# EAGLE board PCB2D (EAGLE 9.7.0)
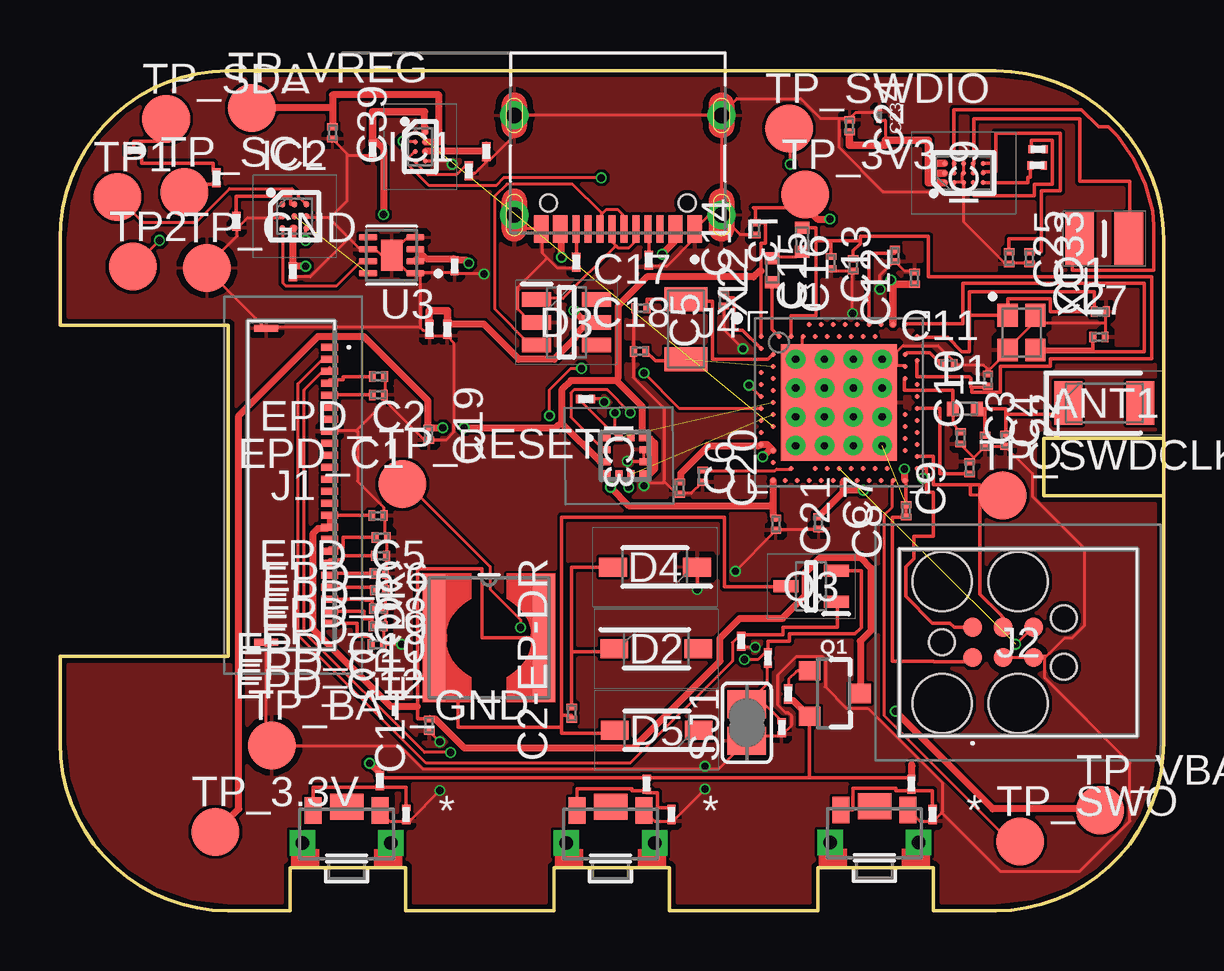
[diagram p0: board, top side]
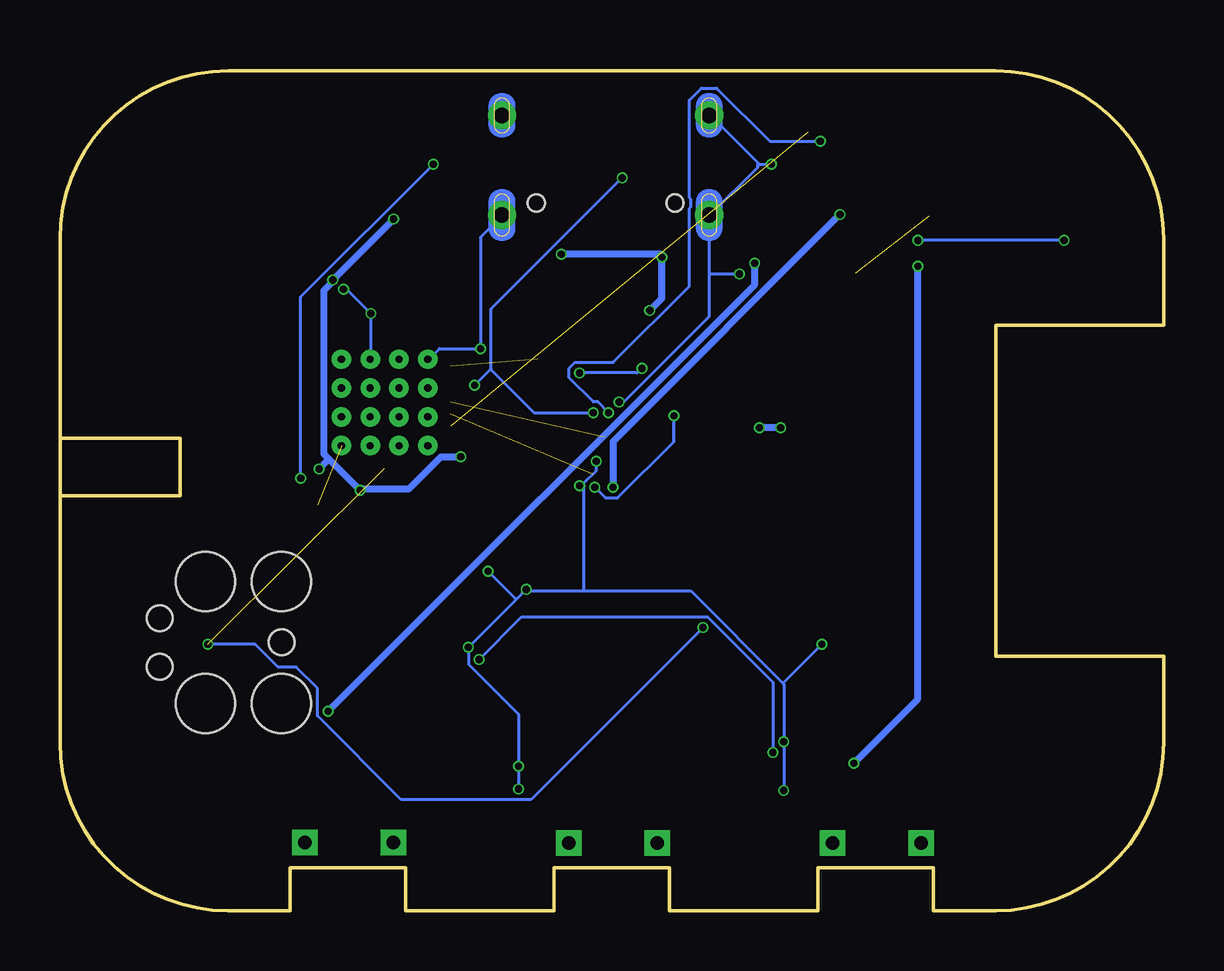
[diagram p1: board, bottom side, seen from below]

Size 46 x 35 mm. Coordinates in mm from the lower left corner, seen from the top.
Outline: 46,17.3 46,7 arc-90 39,0 36.4,0 36.4,1.8 31.6,1.8 31.6,0 25.4,0 25.4,1.8 20.6,1.8 20.6,0 14.4,0 14.4,1.8 9.6,1.8 9.6,0 7,0 arc-90 0,7 0,10.6 7,10.6 7,24.4 0,24.4 0,28 arc-90 7,35 39,35 arc-90 46,28 46,19.7
Outline: 46,17.3 46,17.9
Outline: 46,17.9 46,19.7
Outline: 41,19.7 46,19.7
Outline: 46,19.7 46,17.9
Outline: 41,17.9 41,19.7
Outline: 41,19.7 41,17.3 46,17.3
Outline: 46,17.3 46,17.9
Copper layers (1*16): Top / Bottom
Stack-up Default Layer Stack: Top User Defined 0.035mm / Dielectric-1 User Defined 1.6mm / Bottom User Defined 0.035mm
Design rules: minimum copper width classes=1 0.3mm, minimum copper width 5mil, minimum drill size 0.3mm, copper clearance wire_polygon to wire_polygon 5mil, copper clearance wire_polygon to pad_smd 5mil, copper clearance wire_polygon to via 5mil, copper clearance pad_smd to pad_smd 5mil, copper clearance pad_smd to via 5mil, copper clearance via to via 5mil, copper clearance smd to pad (same net) 5mil, copper clearance smd to via (same net) 5mil, copper clearance smd to smd (same net) 5mil, dimension clearance 0.2mm, via restrict clearance 0mil, restrict clearance 0mil, drill distance 6mil, keepout clearance 0mil
Net classes: 1 traseedeputere: width 0.3 mm

## Footprints (pad centres in the part's own frame; a part is rotated, then mirrored left to right if it is on the bottom)
2450AT18B100E_ANTC3216X140N = smd 1.15 x 1.8: 1 -1.5,0; 2 1.5,0
NORDIC_NRF_3_RESC0201_L = smd 0.28 x 0.43: 1 -0.255,0; 2 0.255,0
GRM011R60J152KE01L_2_CAPC0201X13N = smd 0.22 x 0.23: 1 -0.185,0; 2 0.185,0
GRM011R60J152KE01L_1_0201 = smd 0.35 x 0.25: 1 0,0.275; 2 0,-0.275
ESP32_C6_LIBRARY_5_SOD3716X135N = smd 1.15 x 0.8: 1 -1.75,0; 2 1.75,0
ESP32_C6_LIBRARY_3_SOT95P280X145-6N = smd 1.2 x 0.6: 1 -1.25,0.95; 2 -1.25,0; 3 -1.25,-0.95; 4 1.25,-0.95; 5 1.25,0; 6 1.25,0.95
BQ25180YBGR_BGA8C40P2X4_100X155X50 = smd 0.2 x 0.2: A1 -0.2,0.6; A2 0.2,0.6; B1 -0.2,0.2; B2 0.2,0.2; C1 -0.2,-0.2; C2 0.2,-0.2; D1 -0.2,-0.6; D2 0.2,-0.6
DRV2605YZFR_BGA9C50P3X3_144X144X62 = smd 0.25 x 0.25: A1 -0.5,0.5; A2 0,0.5; A3 0.5,0.5; B1 -0.5,0; B2 0,0; B3 0.5,0; C1 -0.5,-0.5; C2 0,-0.5; C3 0.5,-0.5
BMA423_BMA423 = smd 0.3 x 0.35: 1 -0.75,-0.775; 2 -0.25,-0.775; 3 0.25,-0.775; 4 0.75,-0.775; 7 0.75,0.775; 8 0.25,0.775; 9 -0.25,0.775; 10 -0.75,0.775 | smd 0.35 x 0.3: 5 0.775,-0.25; 6 0.775,0.25; 11 -0.775,0.25; 12 -0.775,-0.25
RT6160AWSC_BGA15C40P3X5_140X230X60 = smd 0.216 x 0.216: A1 -0.4,0.8; A2 0,0.8; A3 0.4,0.8; B1 -0.4,0.4; B2 0,0.4; B3 0.4,0.4; C1 -0.4,0; C2 0,0; C3 0.4,0; D1 -0.4,-0.4; D2 0,-0.4; D3 0.4,-0.4; E1 -0.4,-0.8; E2 0,-0.8; E3 0.4,-0.8
503480-2400_5034802400 = smd 0.3 x 0.7: 1 -5.75,1.525; 2 -5.25,1.525; 3 -4.75,1.525; 4 -4.25,1.525; 5 -3.75,1.525; 6 -3.25,1.525; 7 -2.75,1.525; 8 -2.25,1.525; 9 -1.75,1.525; 10 -1.25,1.525; 11 -0.75,1.525; 12 -0.25,1.525; 13 0.25,1.525; 14 0.75,1.525; 15 1.25,1.525; 16 1.75,1.525; 17 2.25,1.525; 18 2.75,1.525; 19 3.25,1.525; 20 3.75,1.525; 21 4.25,1.525; 22 4.75,1.525; 23 5.25,1.525; 24 5.75,1.525 | smd 0.3 x 1: MP1 -6.54,-1.125; MP2 6.54,-1.125
TC2030-IDC_TC2030IDC = smd 0.783 x 0.783: 1 -0.953,-0.635; 2 -0.953,0.635; 3 0.317,-0.635; 4 0.317,0.635; 5 1.588,-0.635; 6 1.588,0.635 | hole 2.451: -2.223,-2.54; -2.223,2.54; 0.952,-2.54; 0.952,2.54 | hole 1.067: -2.223,0; 2.857,-1.016; 2.857,1.016
KH-TYPE-C-16P_KINGHELM_KH-TYPE-C-16P = smd 0.6 x 1.15: A1_B12 -3.2,4.725; A4_B9 -2.4,4.725; A9_B4 2.4,4.725; A12_B1 3.2,4.725 | smd 0.3 x 1.15: A5 -1.25,4.725; A6 -0.25,4.725; A7 0.25,4.725; A8 1.25,4.725; B5 1.75,4.725; B6 0.75,4.725; B7 -0.75,4.725; B8 -1.75,4.725 | drill 0.65 pad 1.05: SH1 -4.32,0; SH2 4.32,0; SH3 -4.32,4.15; SH4 4.32,4.15 | hole 0.7: -2.89,3.65; 2.89,3.65
NORDIC_NRF_2_RESC0402_L = smd 0.5 x 0.6: 1 -0.5,0; 2 0.5,0
ESP32_C6_LIBRARY_2_IND_4828-WE-TPC_WRE = smd 0.9 x 5.3: 1 -2.286,0; 2 2.286,0
MLP2016SR47MT0S1_INDC2016X100N = smd 1.2 x 2.2: 1 -1.028,0; 2 1.028,0
ESP32_C6_LIBRARY_4_ESP32_C6_LIBRARY_4_ESP32_C6_LIBRARY_4_ESP32_C6_LIBRARY_4_ESP32_WROVER_SPARKFUN-DISCRETESEMI_SOT23-3 = smd 0.8 x 0.9: 1 -0.95,-1; 2 0.95,-1; 3 0,1.1
ESP32_C6_LIBRARY_6_SOT65P210X110-3N = smd 1.05 x 0.5: 1 -1.05,0.65; 2 -1.05,-0.65; 3 1.05,0
CPF0201D7K68C1_0201 = smd 0.35 x 0.25: 1 0,0.275; 2 0,-0.275
ESP32_C6_LIBRARY_7_JUMPER_SJ = smd 1.168 x 1.6: 1 -0.762,0; 2 0.762,0
2025-10-22_07-23-44_LIBRARY_SW_EVP-AKE31A_PAN = smd 0.711 x 1.092: 1 -1.4,-0.972; 2 1.4,-0.972 | drill 0.559 pad 0.914 square: 3 -1.848,0.381; 4 1.848,0.381 | smd 1.397 x 1.092: 5 0,-1.124
HECTOR_WATCH_1_TP20R = smd 2 x 2: TP 0,0
NORDIC_NRF_4_AQFN50P700X700X85_HS-74N = smd 4.85 x 4.85: P$74 0,0 | drill 0.3 pad 0.6: P$75 -1.8,1.8; P$76 -0.6,1.8; P$77 0.6,1.8; P$78 1.8,1.8; P$79 -1.8,0.6; P$80 -0.6,0.6; P$81 0.6,0.6; P$82 1.8,0.6; P$83 -1.8,-0.6; P$84 -0.6,-0.6; P$85 0.6,-0.6; P$86 1.8,-0.6; P$87 -1.8,-1.8; P$88 -0.6,-1.8; P$89 0.6,-1.8; P$90 1.8,-1.8 | smd 0.2 x 0.2: P$A8 -1.25,3.25; P$A10 -0.75,3.25; P$A12 -0.25,3.25; P$A14 0.25,3.25; P$A16 0.75,3.25; P$A18 1.25,3.25; P$A20 1.75,3.25; P$A22 2.25,3.25; P$A23 2.75,3.25; P$AA24 3.25,-2.25; P$AB2 -2.75,-2.5; P$AC5 -2,-2.75; P$AC9 -1,-2.75; P$AC11 -0.5,-2.75; P$AC13 0,-2.75; P$AC15 0.5,-2.75; P$AC17 1,-2.75; P$AC19 1.5,-2.75; P$AC21 2,-2.75; P$AC24 3.25,-2.75; P$AD2 -2.75,-3.25; P$AD4 -2.25,-3.25; P$AD6 -1.75,-3.25; P$AD8 -1.25,-3.25; P$AD10 -0.75,-3.25; P$AD12 -0.25,-3.25; P$AD14 0.25,-3.25; P$AD16 0.75,-3.25; P$AD18 1.25,-3.25; P$AD20 1.75,-3.25; P$AD22 2.25,-3.25; P$AD23 2.75,-3.25; P$B1 -3.25,2.75; P$B3 -2.5,2.75; P$B5 -2,2.75; P$B7 -1.5,2.75; P$B9 -1,2.75; P$B11 -0.5,2.75; P$B13 0,2.75; P$B15 0.5,2.75; P$B17 1,2.75; P$B19 1.5,2.75; P$B24 3.25,2.75; P$C1 -3.25,2.25; P$D2 -2.75,2; P$D23 2.75,2; P$E24 3.25,1.75; P$F2 -2.75,1.5; P$F23 2.75,1.5; P$G1 -3.25,1.25; P$H2 -2.75,1; P$H23 2.75,1; P$J1 -3.25,0.75; P$J24 3.25,0.75; P$K2 -2.75,0.5; P$L1 -3.25,0.25; P$L24 3.25,0.25; P$M2 -2.75,0; P$N1 -3.25,-0.25; P$N24 3.25,-0.25; P$P2 -2.75,-0.5; P$P23 2.75,-0.5; P$R1 -3.25,-0.75; P$R24 3.25,-0.75; P$T2 -2.75,-1; P$T23 2.75,-1; P$U1 -3.25,-1.25; P$U24 3.25,-1.25; P$V23 2.75,-1.5; P$W1 -3.25,-1.75; P$W24 3.25,-1.75; P$Y2 -2.75,-2; P$Y23 2.75,-2
ESP32_C6_LIBRARY_SON50P200X200X80-9N = smd 0.76 x 0.27: 1 -0.985,0.75; 2 -0.985,0.25; 3 -0.985,-0.25; 4 -0.985,-0.75; 5 0.985,-0.75; 6 0.985,-0.25; 7 0.985,0.25; 8 0.985,0.75 | smd 0.9 x 1.3: 9 0,0
NORDIC_NRF_BT-XTAL_2016_N = smd 0.95 x 0.85: 1 -0.725,-0.575; 2 0.725,-0.575; 3 0.725,0.575; 4 -0.725,0.575
NORDIC_NRF_1_XTAL_3215_N = smd 1 x 1.8: 1 -1.25,0; 2 1.25,0

## Placement (x,y rotation side)
ANT1  2450AT18B100E_2450AT18B100E  [2450AT18B100E_ANTC3216X140N]  43.53,21.16 0 top
C1  12pF  [NORDIC_NRF_3_RESC0201_L]  43.36,24.97 0 top
C1-EP-DR  10uF  [NORDIC_NRF_3_RESC0201_L]  15.39,7.74 90 top
C2  12pF  [NORDIC_NRF_3_RESC0201_L]  43.31,23.91 0 top
C2-EP-DR  4.7uF/25V  [NORDIC_NRF_3_RESC0201_L]  21.33,8.24 90 top
C3  1pF  [NORDIC_NRF_3_RESC0201_L]  37.54,19.71 270 top
C4  1pF  [NORDIC_NRF_3_RESC0201_L]  38.56,19.56 270 top
C5  100nF  [NORDIC_NRF_3_RESC0201_L]  27.67,25.46 90 top
C6  4.7uF  [NORDIC_NRF_3_RESC0201_L]  25.84,17.61 270 top
C7  100nF  [NORDIC_NRF_3_RESC0201_L]  31.62,16.16 270 top
C8  100nF  [NORDIC_NRF_3_RESC0201_L]  35.27,16.66 90 top
C9  820pF  [NORDIC_NRF_3_RESC0201_L]  37.92,18.46 90 top
C10  N.C.  [NORDIC_NRF_3_RESC0201_L]  38.68,22.11 90 top
C11  100pF  [NORDIC_NRF_3_RESC0201_L]  37.02,22.76 0 top
C12  100nF  [NORDIC_NRF_3_RESC0201_L]  35.62,26.36 90 top
C13  N.C.  [NORDIC_NRF_3_RESC0201_L]  34.8,27.31 90 top
C14  4.7uF  [NORDIC_NRF_3_RESC0201_L]  28.99,28.41 90 top
C15  1.0uF  [NORDIC_NRF_3_RESC0201_L]  32.14,27.01 90 top
C16  47nF  [NORDIC_NRF_3_RESC0201_L]  33.06,26.91 90 top
C17  12pF  [NORDIC_NRF_3_RESC0201_L]  24.21,25.11 0 top
C18  12pF  [NORDIC_NRF_3_RESC0201_L]  24.16,23.31 0 top
C19  100nF  [NORDIC_NRF_3_RESC0201_L]  15.37,19.86 270 top
C20  4.7uF  [NORDIC_NRF_3_RESC0201_L]  26.79,18.11 270 top
C21  4.7uF  [NORDIC_NRF_3_RESC0201_L]  29.84,16.11 270 top
C22  N.C.  [NORDIC_NRF_3_RESC0201_L]  39.42,19.61 270 top
C23  0.1uF  [GRM011R60J152KE01L_2_CAPC0201X13N]  34.15,33.13 270 top
C24  10uF  [NORDIC_NRF_3_RESC0201_L]  32.91,32.71 270 top
C25  22uF  [NORDIC_NRF_3_RESC0201_L]  39.56,27.21 270 top
C27  0.1uF  [GRM011R60J152KE01L_1_0201]  16.45,26.87 180 top
C29  1uF  [GRM011R60J152KE01L_1_0201]  36.37,4.01 180 top
C30  1uF  [GRM011R60J152KE01L_1_0201]  14.43,4.01 180 top
C31  1uF  [GRM011R60J152KE01L_1_0201]  25.49,4.01 180 top
C32  1uF  [GRM011R60J152KE01L_1_0201]  7.35,28.73 180 top
C33  22uF  [NORDIC_NRF_3_RESC0201_L]  40.41,27.21 270 top
C34  0.1uF  [GRM011R60J152KE01L_1_0201]  9.71,26.63 180 top
C37  1uF  [GRM011R60J152KE01L_1_0201]  17.77,31.63 180 top
C38  1uF  [GRM011R60J152KE01L_1_0201]  13.03,31.73 180 top
C39  10uF  [NORDIC_NRF_3_RESC0201_L]  11.36,32.41 270 top
C42  0.1uF  [GRM011R60J152KE01L_1_0201]  15.39,24.23 180 top
C43  4.7uF  [GRM011R60J152KE01L_1_0201]  16.15,24.23 180 top
D2  MBR0530  [ESP32_C6_LIBRARY_5_SOD3716X135N]  24.86,10.92 0 top
D3  ESP32_C6_LIBRARY_3_USBLC6-2SC6Y  [ESP32_C6_LIBRARY_3_SOT95P280X145-6N]  21.12,24.52 0 top
D4  MBR0530  [ESP32_C6_LIBRARY_5_SOD3716X135N]  24.8,14.32 180 top
D5  MBR0530  [ESP32_C6_LIBRARY_5_SOD3716X135N]  24.88,7.52 180 top
EPD_C1  1uF/50V  [NORDIC_NRF_3_RESC0201_L]  13.27,21.5 180 top
EPD_C2  1uF/50V  [NORDIC_NRF_3_RESC0201_L]  13.28,22.26 180 top
EPD_C5  0.1uF/50V  [NORDIC_NRF_3_RESC0201_L]  13.25,16.46 180 top
EPD_C6  1uF/50V  [NORDIC_NRF_3_RESC0201_L]  13.39,15.56 180 top
EPD_C7  1uF/50V  [NORDIC_NRF_3_RESC0201_L]  13.36,14.8 180 top
EPD_C8  1uF/50V  [NORDIC_NRF_3_RESC0201_L]  13.31,14.06 180 top
EPD_C9  1uF/50V  [NORDIC_NRF_3_RESC0201_L]  13.32,13.36 180 top
EPD_C10  1uF/50V  [NORDIC_NRF_3_RESC0201_L]  13.27,12.6 180 top
EPD_C11  1uF/50V  [NORDIC_NRF_3_RESC0201_L]  13.26,11.86 180 top
EPD_C12  1uF/50V  [NORDIC_NRF_3_RESC0201_L]  13.22,11.1 180 top
IC1  BQ25180YBGR_BQ25180YBGR  [BQ25180YBGR_BGA8C40P2X4_100X155X50]  15.02,31.84 0 top
IC2  DRV2605YZFR_DRV2605YZFR  [DRV2605YZFR_BGA9C50P3X3_144X144X62]  9.78,28.94 0 top
IC3  BMA423_BMA423  [BMA423_BMA423]  23.55,18.96 270.5 top
IC9  RT6160AWSC_RT6160AWSC  [RT6160AWSC_BGA15C40P3X5_140X230X60]  37.67,30.74 90 top
J1  503480-2400_503480-2400  [503480-2400_5034802400]  9.72,17.73 270 top
J2  TC2030-IDC_TC2030-IDC  [TC2030-IDC_TC2030IDC]  38.99,11.18 0 top
J4  KH-TYPE-C-16P_KH-TYPE-C-16P  [KH-TYPE-C-16P_KINGHELM_KH-TYPE-C-16P]  23.26,33.14 180 top
L1  3.9nH  [NORDIC_NRF_2_RESC0402_L]  37.72,20.91 0 top
L2  10uH  [NORDIC_NRF_2_RESC0402_L]  29.69,26.68 90 top
L3  15nH  [NORDIC_NRF_2_RESC0402_L]  30.94,27.96 90.4 top
L5  68uH  [ESP32_C6_LIBRARY_2_IND_4828-WE-TPC_WRE]  17.88,11.37 0 top
L7  MLP2016SR47MT0S1_FTC252012SR47MBCA  [MLP2016SR47MT0S1_INDC2016X100N]  43.53,28.01 0 top
Q1  20V/4.2A/52mΩ/1.4W  [ESP32_C6_LIBRARY_4_ESP32_C6_LIBRARY_4_ESP32_C6_LIBRARY_4_ESP32_C6_LIBRARY_4_ESP32_WROVER_SPARKFUN-DISCRETESEMI_SOT23-3]  32.24,9.06 270 top
Q3  ESP32_C6_LIBRARY_6_SI1308EDL-T1-GE3  [ESP32_C6_LIBRARY_6_SOT65P210X110-3N]  31.31,13.52 180 top
R1_EP_DR  0.47  [CPF0201D7K68C1_0201]  29.51,10.53 180 top
R1_USB  5K1  [CPF0201D7K68C1_0201]  24.54,27.11 180 top
R2  0  [CPF0201D7K68C1_0201]  40.73,31.06 270 top
R2_EP_DR1  10K  [CPF0201D7K68C1_0201]  28.39,11.23 180 top
R2_USB  5K1  [CPF0201D7K68C1_0201]  21.52,27.03 359.3 top
R3  0  [CPF0201D7K68C1_0201]  21.91,21.33 270 top
R4  0  [CPF0201D7K68C1_0201]  40.77,31.73 270 top
R5  10K  [CPF0201D7K68C1_0201]  13.33,5.43 180 top
R7  10K  [CPF0201D7K68C1_0201]  35.49,5.28 180 top
R8  10K  [CPF0201D7K68C1_0201]  24.45,5.28 180 top
R9  10K  [CPF0201D7K68C1_0201]  17.04,30.83 180 top
R17  3K3  [CPF0201D7K68C1_0201]  6.52,30.54 0 top
R18  3K3  [CPF0201D7K68C1_0201]  3.12,31.69 270 top
R_TYPE_SEL  2.2  [CPF0201D7K68C1_0201]  30.09,7.63 180 top
R_TYPE_SEL1  10K  [CPF0201D7K68C1_0201]  30.35,9.03 0 top
SJ1  [ESP32_C6_LIBRARY_7_JUMPER_SJ]  28.63,7.84 90 top
SW1  2025-10-22_07-23-44_LIBRARY_EVP-AKE31ASW_EVP-AKE31A_PAN  [2025-10-22_07-23-44_LIBRARY_SW_EVP-AKE31A_PAN]  11.95,3.21 180 top
SW2  2025-10-22_07-23-44_LIBRARY_EVP-AKE31ASW_EVP-AKE31A_PAN  [2025-10-22_07-23-44_LIBRARY_SW_EVP-AKE31A_PAN]  22.95,3.21 180 top
SW3  2025-10-22_07-23-44_LIBRARY_EVP-AKE31ASW_EVP-AKE31A_PAN  [2025-10-22_07-23-44_LIBRARY_SW_EVP-AKE31A_PAN]  33.95,3.23 180 top
TP1  HECTOR_WATCH_1_TPTP20R  [HECTOR_WATCH_1_TP20R]  2.39,29.74 0 top
TP2  HECTOR_WATCH_1_TPTP20R  [HECTOR_WATCH_1_TP20R]  3.04,26.84 0 top
TP_3.3V  HECTOR_WATCH_1_TPTP20R  [HECTOR_WATCH_1_TP20R]  6.48,3.29 0 top
TP_3V3  HECTOR_WATCH_1_TPTP20R  [HECTOR_WATCH_1_TP20R]  31.07,29.84 0 top
TP_BAT_GND  HECTOR_WATCH_1_TPTP20R  [HECTOR_WATCH_1_TP20R]  8.83,6.89 0 top
TP_GND  HECTOR_WATCH_1_TPTP20R  [HECTOR_WATCH_1_TP20R]  6.13,26.79 0 top
TP_RESET  HECTOR_WATCH_1_TPTP20R  [HECTOR_WATCH_1_TP20R]  14.27,17.78 0 top
TP_SCL  HECTOR_WATCH_1_TPTP20R  [HECTOR_WATCH_1_TP20R]  5.19,29.94 0 top
TP_SDA  HECTOR_WATCH_1_TPTP20R  [HECTOR_WATCH_1_TP20R]  4.43,32.99 0 top
TP_SWDCLK  HECTOR_WATCH_1_TPTP20R  [HECTOR_WATCH_1_TP20R]  39.29,17.31 0 top
TP_SWDIO  HECTOR_WATCH_1_TPTP20R  [HECTOR_WATCH_1_TP20R]  30.39,32.6 0 top
TP_SWO  HECTOR_WATCH_1_TPTP20R  [HECTOR_WATCH_1_TP20R]  40.02,2.89 0 top
TP_VBAT  HECTOR_WATCH_1_TPTP20R  [HECTOR_WATCH_1_TP20R]  43.35,4.19 0 top
TP_VREG  HECTOR_WATCH_1_TPTP20R  [HECTOR_WATCH_1_TP20R]  7.99,33.45 0 top
U1  NORDIC_NRF_4_NRF52840_QF  [NORDIC_NRF_4_AQFN50P700X700X85_HS-74N]  32.47,21.18 0 top
U3  ESP32_C6_LIBRARY_MAX17048G+T10  [ESP32_C6_LIBRARY_SON50P200X200X80-9N]  13.83,27.31 180 top
X1  [NORDIC_NRF_BT-XTAL_2016_N]  40.08,24.09 270 top
X2  32.768kHZ  [NORDIC_NRF_1_XTAL_3215_N]  26.09,24.24 270 top

## Library data of the parts
ANT1 = InkTime_v5; ARROW_PART_NUMBER: 2450AT18B100E; ARROW_PRICE-STOCK: https://www.arrow.com/en/products/2450at18b100e/johanson-dielectrics?utm_currency=USD&region=nac; DESCRIPTION: Antennas 2.45GHz ANTENNA; HEIGHT: 1.4mm; MANUFACTURER_NAME: JOHANSON TECHNOLOGY; MANUFACTURER_PART_NUMBER: 2450AT18B100E; MOUSER_PART_NUMBER: 609-2450AT18B100E; MOUSER_PRICE-STOCK: https://www.mouser.co.uk/ProductDetail/Johanson-Technology/2450AT18B100E?qs=yCnrNFeXz%252Bh5MFsFIXGZGA%3D%3D
C1 C1-EP-DR C2 C2-EP-DR C3-C22 C24 C25 C27 C29-C34 C37-C39 C42 C43 EPD_C1 EPD_C2 EPD_C5-EPD_C12 L1-L3 R1_EP_DR R1_USB R2 R2_EP_DR1 R2_USB R3-R5 R7-R9 R17 R18 R_TYPE_SEL R_TYPE_SEL1 SJ1 TP1 TP2 TP_3.3V TP_3V3 TP_BAT_GND TP_GND TP_RESET TP_SCL TP_SDA TP_SWDCLK TP_SWDIO TP_SWO TP_VBAT TP_VREG U1 X1 X2 = InkTime_v5
C23 = InkTime_v5; AVAILABILITY: In Stock; CHECK_PRICES: https://www.snapeda.com/parts/GRM011R60J152KE01L/Murata/view-part/?ref=eda; DESCRIPTION: SMD Capacitor X5R(EIA) with Capacitance: 1500pF Tol. 10%. Rated Voltage: 6.3Vdc; MF: Murata; MP: GRM011R60J152KE01L; PACKAGE: 0201 Murata; PRICE: None; SNAPEDA_LINK: https://www.snapeda.com/parts/GRM011R60J152KE01L/Murata/view-part/?ref=snap
D2 D4 D5 = InkTime_v5; AVAILABILITY: In Stock; CHECK_PRICES: https://www.snapeda.com/parts/MBR0530/Onsemi/view-part/?ref=eda; DESCRIPTION: Diode Schottky 30 V 500mA Surface Mount SOD-123; MF: ON Semiconductor; MP: MBR0530; PACKAGE: SOD-123-2 ON Semiconductor; PRICE: None; PURCHASE-URL: https://www.snapeda.com/api/url_track_click_mouser/?unipart_id=179458&manufacturer=ON Semiconductor&part_name=MBR0530&search_term=None; SNAPEDA_LINK: https://www.snapeda.com/parts/MBR0530/Onsemi/view-part/?ref=snap
D3 = InkTime_v5; AVAILABILITY: In Stock; CHECK_PRICES: https://www.snapeda.com/parts/USBLC6-2SC6Y/STMicroelectronics/view-part/?ref=eda; DESCRIPTION: 17V Clamp 5A (8/20µs) Ipp Tvs Diode Surface Mount SOT-23-6; MF: STMicroelectronics; MP: USBLC6-2SC6Y; PACKAGE: SOT-23-6 STMicroelectronics; PRICE: None; SNAPEDA_LINK: https://www.snapeda.com/parts/USBLC6-2SC6Y/STMicroelectronics/view-part/?ref=snap
IC1 = InkTime_v5; ARROW_PART_NUMBER: BQ25180YBGR; ARROW_PRICE-STOCK: https://www.arrow.com/en/products/bq25180ybgr/texas-instruments?utm_currency=USD&region=nac; DESCRIPTION: Charger IC Lithium Ion/Polymer, Lithium Iron Phosphate 8-DSBGA (1.6x1.1); HEIGHT: 0.5mm; MANUFACTURER_NAME: Texas Instruments; MANUFACTURER_PART_NUMBER: BQ25180YBGR; MOUSER_PART_NUMBER: 595-BQ25180YBGR; MOUSER_PRICE-STOCK: https://www.mouser.co.uk/ProductDetail/Texas-Instruments/BQ25180YBGR?qs=doiCPypUmgEWjAK%252BJAX6Tw%3D%3D
IC2 = InkTime_v5; ARROW_PART_NUMBER: DRV2605YZFR; ARROW_PRICE-STOCK: https://www.arrow.com/en/products/drv2605yzfr/texas-instruments?region=nac; DESCRIPTION: Haptic Driver for ERM/LRA with Built-In Library and Smart Loop Architecture; HEIGHT: 0.625mm; MANUFACTURER_NAME: Texas Instruments; MANUFACTURER_PART_NUMBER: DRV2605YZFR
IC3 = InkTime_v5; ARROW_PART_NUMBER: BMA423; ARROW_PRICE-STOCK: https://www.arrow.com/en/products/bma423/bosch; DESCRIPTION: Accelerometers Triaxial low-g 12bit Acceleration Sensor; HEIGHT: 1mm; MANUFACTURER_NAME: BOSCH; MANUFACTURER_PART_NUMBER: BMA423; MOUSER_PART_NUMBER: 262-BMA423; MOUSER_PRICE-STOCK: https://www.mouser.co.uk/ProductDetail/Bosch-Sensortec/BMA423?qs=HXFqYaX1Q2xC%252BSgeGoX3mg%3D%3D
IC9 = InkTime_v5; DESCRIPTION: Buck-Boost Regulator Positive Output Step-Up/Step-Down I2C DC-DC Controller IC 15-WL-CSP (BSC) (1.4x2.3); HEIGHT: 0.6mm; MANUFACTURER_NAME: RICHTEK; MANUFACTURER_PART_NUMBER: RT6160AWSC; MOUSER_PART_NUMBER: 835-RT6160AWSC; MOUSER_PRICE-STOCK: https://www.mouser.co.uk/ProductDetail/Richtek/RT6160AWSC?qs=amGC7iS6iy%2FLd9PSoixZXQ%3D%3D
J1 = InkTime_v5; DESCRIPTION: FFC & FPC Connectors 0.5mm FPC RA SMT Dual Contact 24Ckt; HEIGHT: 1.87mm; MANUFACTURER_NAME: Molex; MANUFACTURER_PART_NUMBER: 503480-2400; MOUSER_PART_NUMBER: 538-503480-2400; MOUSER_PRICE-STOCK: https://www.mouser.co.uk/ProductDetail/Molex/503480-2400?qs=OAhjpuo3Vu7efIoxFh9AOw%3D%3D
J2 = InkTime_v5; DESCRIPTION: CABLE ADAPTER 6 POS; HEIGHT: 19mm; MANUFACTURER_NAME: Tag Connect; MANUFACTURER_PART_NUMBER: TC2030-IDC
J4 = InkTime_v5; AVAILABILITY: Not in stock; CHECK_PRICES: https://www.snapeda.com/parts/KH-TYPE-C-16P/Kinghelm/view-part/?ref=eda; MF: kinghelm; MP: KH-TYPE-C-16P; PACKAGE: None; PRICE: None; SNAPEDA_LINK: https://www.snapeda.com/parts/KH-TYPE-C-16P/Kinghelm/view-part/?ref=snap
L5 = InkTime_v5; COPYRIGHT: Copyright (C) 2024 Ultra Librarian. All rights reserved.; MANUFACTURER_PART_NUMBER: 744043680; MFR_NAME: Wurth Electronics
L7 = InkTime_v5; DESCRIPTION: SMD / SMT Inductors (Coils), L=0.47?H, L x W x T :; HEIGHT: 1mm; JLCPCB: https://jlcpcb.com/partdetail/6763488-FTC252012SR47MBCA/C5832368; MANUFACTURER_NAME: TDK; MANUFACTURER_PART_NUMBER: FTC252012SR47MBCA
Q1 = InkTime_v5; PROD_ID: TRAN-14388
Q3 = InkTime_v5; AVAILABILITY: In Stock; CHECK_PRICES: https://www.snapeda.com/parts/SI1308EDL-T1-GE3/Vishay+Siliconix/view-part/?ref=eda; DESCRIPTION: Si1308EDL-T1-GE3 N-channel MOSFET Transistor, 1.5 A, 30 V, 3-Pin SC-70 | Siliconix / Vishay SI1308EDL-T1-GE3; MF: Vishay Siliconix; MP: SI1308EDL-T1-GE3; PACKAGE: SOT-323 Vishay Semiconductor; PRICE: None; PURCHASE-URL: https://www.snapeda.com/api/url_track_click_mouser/?unipart_id=274603&manufacturer=Vishay Siliconix&part_name=SI1308EDL-T1-GE3&search_term=None; SNAPEDA_LINK: https://www.snapeda.com/parts/SI1308EDL-T1-GE3/Vishay+Siliconix/view-part/?ref=snap
SW1-SW3 = InkTime_v5; COPYRIGHT: Copyright (C) 2025 Ultra Librarian. All rights reserved.; DIGI-KEY_PART_NUMBER_1: P123437TR-ND; DIGI-KEY_PART_NUMBER_2: P123437CT-ND; DIGI-KEY_PART_NUMBER_3: P123437DKR-ND; MANUFACTURER_NAME: Panasonic; MANUFACTURER_PART_NUMBER: EVP-AKE31A
U3 = InkTime_v5; AVAILABILITY: In Stock; CHECK_PRICES: https://www.snapeda.com/parts/MAX17048G+T10/Analog+Devices/view-part/?ref=eda; DESCRIPTION: 3µA 1-Cell/2-Cell Fuel Gauge with ModelGauge; MF: Analog Devices; MP: MAX17048G+T10; PACKAGE: TDFN-8 Maxim; PRICE: None; PURCHASE-URL: https://www.snapeda.com/api/url_track_click_mouser/?unipart_id=329239&manufacturer=Analog Devices&part_name=MAX17048G+T10&search_term=None; SNAPEDA_LINK: https://www.snapeda.com/parts/MAX17048G+T10/Analog+Devices/view-part/?ref=snap

## Nets
3V3/1.7D [traseedeputere]: C34.2 IC2.C2 Q1.2 R5.2 R7.2 R8.2 R_TYPE_SEL1.2
3V3/2.4A [traseedeputere]: C6.1 C7.1 C8.1 C12.1 C14.2 C19.1 IC3.3 IC3.7 IC3.10 J2.1 TP_3.3V.TP TP_3V3.TP U1.P$A22 U1.P$AD14 U1.P$AD23 U1.P$B1 U1.P$W1 U1.P$Y2
ALERT/1.6C: U3.5
ALERT/2.5C: U1.P$J24
D+/1.5D: D3.4
D+/2.7D: U1.P$AD6
D-/1.5D: D3.6
D-/2.7D: U1.P$AD4
DEC3: C11.1 U1.P$D23
DEC4_6: C10.1 C15.2 C16.2 L3.2 U1.P$B5 U1.P$E24
DN: D3.1 J4.A7 J4.B7
DP: D3.3 J4.A6 J4.B6
EPD_3V3 [traseedeputere]: C1-EP-DR.2 EPD_C5.2 J1.15 J1.16 L5.2 Q1.3
EPD_BUSY/1.5D: J1.9
EPD_BUSY/2.2D: U1.P$AD12
EPD_CS/1.4C: J1.12
EPD_CS/2.2D: U1.P$K2
EPD_DC/1.5D: J1.11
EPD_DC/2.2D: U1.P$AD10
EPD_RST/1.5D: J1.10
EPD_RST/2.2D: U1.P$AC11
GDR: J1.2 Q3.1 R2_EP_DR1.2
GND: C1-EP-DR.1 C1.2 C2.2 C3.2 C4.2 C5.1 C6.2 C7.2 C8.2 C9.2 C10.2 C11.2 C12.2 C13.1 C14.1 C15.1 C16.1 C17.1 C18.1 C19.2 C20.2 C21.2 C22.2 C23.1 C24.1 C25.2 C27.1 C29.1 C30.1 C31.1 C32.1 C33.2 C34.1 C37.1 C38.1 C39.2 C42.1 C43.1 D3.2 D4.1 EPD_C1.1 EPD_C2.1 EPD_C5.1 EPD_C6.1 EPD_C7.1 EPD_C8.1 EPD_C9.1 EPD_C10.1 EPD_C11.1 EPD_C12.1 IC1.D2 IC2.B1 IC2.B3 IC3.8 IC3.9 IC9.B1 IC9.C1 IC9.C2 IC9.C3 J1.8 J1.MP1 J1.MP2 J2.3 J2.5 J4.A1_B12 J4.A12_B1 J4.SH1 J4.SH2 J4.SH3 J4.SH4 R1_USB.1 R2_EP_DR1.1 R2_USB.2 R3.1 R9.1 R_TYPE_SEL.1 SJ1.1 SW1.1 SW2.1 SW3.1 TP_BAT_GND.TP TP_GND.TP U1.P$74 U1.P$75 U1.P$76 U1.P$77 U1.P$78 U1.P$79 U1.P$80 U1.P$81 U1.P$82 U1.P$83 U1.P$84 U1.P$85 U1.P$86 U1.P$87 U1.P$88 U1.P$89 U1.P$90 U1.P$B7 U1.P$F23 U3.1 U3.4 U3.6 U3.9 X1.2 X1.4
HAPTIC_EN/1.4C: IC2.A1
HAPTIC_EN/2.6A: U1.P$U1
IMU_INT1: IC3.5 U1.P$N1
IMU_INT2: IC3.6 U1.P$P2
LX1: IC9.B2 IC9.B3 L7.1
LX2: IC9.D2 IC9.D3 L7.2
MOSI/1.5B: J1.14
MOSI/2.2D: U1.P$B13
N$1: IC1.D1 R9.2
N$2: C23.2 C24.2 IC9.A1 IC9.A2 IC9.A3
N$3: C25.1 C33.1 IC9.E2 IC9.E3
N$4: R17.1 R18.1
N$5: IC9.D1 R4.2
N$6: IC9.E1 R2.2
N$7: R4.1
N$8: C32.2 IC2.A2
N$9: R2.1
N$10: R17.2 TP_SCL.TP
N$11: R18.2 TP_SDA.TP
N$12: IC3.1 R3.2
N$13: C20.1 U1.P$AC5
N$14: C9.1 U1.P$N24
N$15: C3.1 L1.1 U1.P$H23
N$16: C5.2 U1.P$C1
N$17: C1.1 U1.P$B24 X1.1
N$18: C2.1 U1.P$A23 X1.3
N$19: L2.1 U1.P$B3
N$20: L2.2 L3.1
N$21: C13.2 U1.P$A18
N$22: EPD_C2.2 J1.4
N$23: EPD_C1.2 J1.5
N$24: J1.17
N$26: EPD_C6.2 J1.18
N$27: EPD_C7.2 J1.19
N$28: EPD_C8.2 J1.20
N$29: EPD_C9.2 J1.21
N$30: EPD_C10.2 J1.22
N$31: EPD_C11.2 J1.23
N$32: EPD_C12.2 J1.24
N$33: C2-EP-DR.2 D2.1 D4.2
N$34: R1_EP_DR.1 R_TYPE_SEL.2 SJ1.2
N$35: C2-EP-DR.1 D5.2 L5.1 Q3.3
N$40: J4.B5 R2_USB.1
N$44: J4.A5 R1_USB.2
OUT+: IC2.A3 TP1.TP
OUT-: IC2.C3 TP2.TP
P0.00/XL1: C17.2 U1.P$D2 X2.1
P0.01/XL2: C18.2 U1.P$F2 X2.2
P0.04: U1.P$J1
P0.09: U1.P$L24
P0.13/1.5D: C30.2 R5.1 SW1.2
P0.13/2.6C: U1.P$AD8
P0.14/1.5D: C31.2 R8.1 SW2.2
P0.14/2.7C: U1.P$AC9
P0.19: U1.P$AC15
P0.20: U1.P$AD16
P0.21: U1.P$AC17
P0.22: U1.P$AD18
P0.23: U1.P$AC19
P0.24: U1.P$AD20
P0.25: U1.P$AC21
P0.26: U1.P$G1
P0.27: U1.P$H2
P0.28: U1.P$B11
P0.29: U1.P$A10
P0.30: U1.P$B9
P0.31: U1.P$A8
P1.01/1.6C: Q1.1 R_TYPE_SEL1.1
P1.01/2.4B: U1.P$Y23
P1.02/1.6C: C29.2 R7.1 SW3.2
P1.02/2.8C: U1.P$W24
P1.03: U1.P$V23
P1.04: U1.P$U24
P1.05: U1.P$T23
P1.06: U1.P$R24
P1.07: U1.P$P23
P1.09: U1.P$R1
P1.10: U1.P$A20
P1.11: U1.P$B19
P1.12: U1.P$B17
P1.13: U1.P$A16
P1.14: U1.P$B15
P1.15: U1.P$A14
PMIC_INT: IC1.A1 U1.P$T2
PREVGH: D5.1
PREVGL: D2.2
RESE: J1.3 Q3.2 R1_EP_DR.2
RESET: J2.6 TP_RESET.TP U1.P$AC13
RF: ANT1.1 C4.1 C22.1 L1.2
SCK/1.5B: J1.13
SCK/2.2D: U1.P$A12
SCL/1.4C: IC2.C1 U3.7
SCL/2.4C: IC1.B1 IC3.12 U1.P$M2
SDA/1.4C: IC2.B2 U3.8
SDA/2.4C: IC1.C1 IC3.2 U1.P$L1
SWDCLK: J2.4 TP_SWDCLK.TP U1.P$AA24
SWDIO: J2.2 TP_SWDIO.TP U1.P$AC24
SWO: TP_SWO.TP U1.P$AD22
VBAT/1.2A [traseedeputere]: C27.2 TP_VBAT.TP U3.2 U3.3
VBAT/2.5C [traseedeputere]: C37.2 IC1.C2
VBUS/1.5D [traseedeputere]: C42.2 C43.2 D3.5 J4.A4_B9 J4.A9_B4
VBUS/2.6D [traseedeputere]: C21.1 C38.2 IC1.A2 U1.P$AD2
VREG [traseedeputere]: C39.1 IC1.B2 TP_VREG.TP

## Tracks (layer width: path | path; a pad name or v marks a point on that pad's centre or on a via)
3V3/1.7D  (via drill 0.3)
  Top 0.152: R7.2 31.3,5.55 | 31.3,5.55 R8.2 13.33,5.55 R5.2 | 35.49,6.1 35.5,6.1 | Q1.2 31.24,5.55 31.3,5.55
  Top 0.3: IC2.C2 9.71,28.44 C34.2 9.8,26.85 v10.24,26.85 | 35.5,6.1 35.52,6.03 35.52,5.58 R7.2 | R_TYPE_SEL1.2 30.37,8.76 30.56,8.76 31.2,8.12 Q1.2 | v12.91,6.15 13.29,5.77 R5.2
  Bottom 0.3: v10.24,26.85 10.24,8.82 v12.91,6.15
3V3/2.4A  (via drill 0.3)
  Top 0.152: TP_3V3.TP 31.07,29.3 28.9,29.3 28.99,29.21 C14.2 29.41,28.66 29.41,27.81 29.22,27.81 29.22,26.66 U1.P$B1 | U1.P$AD23 35.27,17.88 C8.1 34.7,16.41 34.7,10.4 36.4,10.4 36.43,10.37 38.01,10.37 38.04,10.4 J2.1
  Top 0.3: 20.91,20.31 22.5,18.73 22.75,18.73 IC3.3 | 20.91,20.31 20.91,21.71 21.29,22.09 23.2,22.09 | 23.2,22.09 24.28,21.01 24.28,19.74 IC3.10 24.47,19.68 24.6,19.68 24.79,19.49 24.79,18.41 24.6,18.22 IC3.7 | U1.P$W1 29.48,19.42 29.64,19.27 | 29.64,19.27 29.68,19.23 U1.P$Y2 | U1.P$W1 | C6.1 25.87,17.9 25.87,18.22 27.01,19.36 29.1,19.36 U1.P$W1 | 32.66,17.52 32.66,17.46 31.64,16.44 C7.1 | 32.66,17.52 32.66,17.9 U1.P$AD14 | v34.63,26.28 34.63,26.22 34.72,26.1 | v32.09,28.82 31.58,28.82 31.14,29.27 TP_3V3.TP | v33.49,17.52 32.79,17.52 32.66,17.52 | v29.3,18.92 29.55,19.17 29.64,19.27 | 23.2,22.09 23.26,22.22 23.26,25.2 24.47,26.41 28.91,26.41 29.17,26.66 29.22,26.66 | v35.2,18.41 35.2,17.96 U1.P$AD23 | TP_3.3V.TP 6.5,3.29 7.45,4.25 7.45,20.63 10.75,23.93 12.66,23.93 15.33,21.27 15.33,20.12 C19.1 15.52,20.12 v15.96,20.12 | v16.85,20.12 20.66,20.12 20.79,20.25 20.91,20.31
  Top 0.302: U1.P$A22 34.72,26.1 C12.1
  Bottom 0.3: v32.09,28.82 v34.63,26.28 34.69,26.16 35.01,25.84 35.01,19.04 34.79,18.82 | 34.79,18.82 v33.49,17.52 33.36,17.58 31.45,17.58 30.12,18.92 v29.3,18.92 | v35.2,18.41 34.88,18.73 34.79,18.82 | v15.96,20.12 v16.85,20.12
DEC3
  Top 0.152: U1.P$D23 35.3,23.26 36.26,23.26 C11.1
DEC4_6
  Top 0.152: 31.5,27.91 32.14,27.91 | 32.14,27.91 32.54,27.91 33.36,27.91 33.36,27.8 | 32.14,27.91 C15.2 | 33.36,27.8 33.06,27.5 C16.2 | U1.P$B5 30.47,24.8 31.5,24.8 31.5,27.91 | U1.P$E24 35.72,22.25 37.9,22.25 37.96,22.19 37.96,21.82 | 33.36,27.8 33.36,28.1 36.2,28.1 36.2,26.42 45.5,26.42 45.5,23 41.28,23 41.28,22.69 39.2,22.69 39.2,22.6 39.2,21.6 38,21.6 38,21.82 37.96,21.82 | 37.96,21.82 38.19,21.82 38.68,21.82 C10.1 | 31.5,27.91 31.5,28.46 L3.2
DN
  Top 0.127: 23.17,27.71 23.26,27.62 23.71,27.62 23.96,27.87 23.96,28.38 J4.B7 | 23.17,27.71 23.01,27.87 23.01,28.38 J4.A7 | D3.1 19.9,25.52 20.98,25.52 23.13,27.68 23.17,27.71
DP
  Top 0.127: 22.59,29.04 22.75,29.2 23.26,29.2 23.45,29.01 23.45,28.44 J4.A6 | 22.59,29.04 22.56,29.01 22.56,28.44 J4.B6 | D3.3 19.83,23.62 19.58,23.62 18.12,25.08 18.12,29.78 18.63,30.28 21.36,30.28 22.56,29.08 22.59,29.04
EPD_3V3
  Top 0.152: J1.15 13,16.48 EPD_C5.2 | C1-EP-DR.2 14.9,7.99 14.9,8.5 14.9,14.1 14.9,14.25 17.6,14.25 17.6,14.1 17.6,11.37 L5.2 18,11.37
  Top 0.3: J1.15 11.26,16.44 11.26,15.99 J1.16 11.13,15.93 10.75,15.93 10.56,15.74 10.56,11.74 13.8,8.5 14.88,8.5 14.9,8.5 | Q1.3 33.36,9.07 33.36,11.23 33.8,11.68 33.8,14.28 33.36,14.73 31.71,14.73 31.07,14.09 31.07,13.14 30.12,12.18 28.34,12.18 27.52,11.36 27.52,10.41 23.9,6.79 16.85,6.79 15.64,7.99 15.45,7.99 C1-EP-DR.2
GDR
  Top 0.127: J1.2 11.2,22.98 10.94,22.98 9.93,21.96 9.93,11.49 15.26,6.15 23.77,6.15 28.02,10.41 28.02,11.17 28.34,11.49 R2_EP_DR1.2
  Top 0.152: Q3.1 32.4,12.87 32.4,12 32.4,11.81 30.13,11.81 30.13,11.5 R2_EP_DR1.2
GND  (via drill 0.3)  (1 unrouted)
  Top 0.127: C20.2 26.75,17.84 26.31,17.39 25.87,17.39 C6.2 25.8,17.39 25.67,17.39 25.2,17.87 | C17.1 23.9,25.08 23.9,23.36 C18.1 23.9,23.3 23.9,22.22 25.17,20.95 25.17,17.9 25.2,17.87 | SW2.1 24.41,4.12 24.79,3.74 C31.1 25.55,3.74 v26.88,5.07 | SW1.1 13.36,4.12 13.74,3.74 14.37,3.74 C30.1 14.56,3.74 v15.83,5.01 | C7.2 31.58,15.87 29.87,15.87 C21.2 29.8,15.8 v28.15,14.15 | IC3.9 24.34,19.17 IC3.8 24.28,18.73 v23.64,18.73 | v28.98,10.98 28.41,10.98 R2_EP_DR1.1 | v26.56,13.39 26.56,14.28 D4.1 | v15.83,7.04 15.45,7.42 C1-EP-DR.1 | v24.34,17.71 24.47,17.84 25.17,17.84 25.2,17.87 | J2.3 39.33,10.53 40.53,10.53 J2.5 40.6,10.6 41.04,10.6 | 38.09,18.88 38.5,19.3 C4.2 38.57,19.36 39.39,19.36 C22.2 39.45,19.3 40.53,18.22 40.53,17.27 42.69,15.11 42.69,11.87 42.19,11.36 41.87,11.36 41.11,10.6 41.04,10.6 | 38.09,18.88 37.93,18.73 C9.2 | C3.2 37.55,19.42 38.06,18.92 38.09,18.88 | J1.MP2 8.59,11.17 8.59,7.1 8.78,6.91 TP_BAT_GND.TP 8.85,6.85 14.18,6.85 15.13,5.9 26.88,5.9 | SW3.1 35.39,4.18 35.83,3.74 36.34,3.74 C29.1 36.41,3.74 36.76,4.09 | 36.76,4.09 36.79,4.12 36.79,5.33 33.68,8.44 32.79,8.44 31.9,9.33 31.9,10.47 31.77,10.6 30.69,10.6 29.93,9.84 29.93,8.57 30.25,8.25 30.37,8.25 30.5,8.12 30.5,7.74 30.12,7.36 R_TYPE_SEL.1 30.06,7.3 28.85,7.3 28.66,7.1 SJ1.1 28.6,7.04 27.45,5.9 26.88,5.9 | 41.04,10.6 41.04,9.71 44.6,6.15 44.6,3.74 42.5,1.64 39.2,1.64 36.79,4.06 36.76,4.09 | 26.88,5.9 v26.88,6.03 | EPD_C2.1 13.55,22.22 13.55,21.52 EPD_C1.1 13.55,21.46 13.55,21.27 13.58,21.23 | 13.58,21.23 15.2,19.61 15.33,19.61 C19.2 15.39,19.61 16.09,19.61 16.4,19.93 16.4,23.68 16.15,23.93
  Top 0.127: 12.37,20.03 13.55,21.2 13.58,21.23 | 12.37,20.03 12.34,20 11.26,20 J1.8 | 12.37,20.03 12.4,20 12.4,17.9 13.48,16.82 13.48,16.5 EPD_C5.1 13.55,16.44 13.55,15.68 13.61,15.61 EPD_C6.1 13.61,15.55 13.61,14.85 EPD_C7.1 13.61,14.79 13.61,14.09 EPD_C8.1 13.61,14.03 13.61,13.39 EPD_C9.1 13.55,13.33 13.55,12.63 EPD_C10.1 13.55,12.57 13.55,11.87 EPD_C11.1 13.48,11.8 13.48,11.11 EPD_C12.1 13.55,11.11 v14.24,11.11 | IC2.B1 9.23,28.89 7.83,28.89 7.39,28.44 C32.1 7.39,28.38 7.39,28.12 6.12,26.85 TP_GND.TP 6.12,26.73 8.53,24.31 J1.MP1 8.59,24.31 15.01,24.31 | 16.15,23.93 15.45,23.93 C42.1 15.39,24 15.2,24.19 15.13,24.19 15.01,24.31 | 16.15,23.93 C43.1 16.15,23.93 | 15.01,26.6 14.82,26.6 U3.1 | 15.01,26.6 16.4,26.6 C27.1 16.47,26.54 v17.67,26.54 | 15.01,26.6 15.01,24.31 | 15.01,26.6 U3.1 | U3.4 14.75,28 14.44,28 13.8,27.36 U3.9 | 11.99,31.52 11.39,32.12 C39.2 | 11.99,31.52 12.02,31.49 12.97,31.49 C38.1 | 12.05,28.03 12.47,27.62 12.78,27.62 U3.6 13.16,27.55 13.36,27.36 13.74,27.36 U3.9 | 12.05,28.03 11.23,28.85 | 11.23,28.85 11.2,28.89 10.31,28.89 IC2.B3 | C34.1 9.74,26.41 10.44,26.41 12.02,28 12.05,28.03 | 11.99,31.52 11.96,31.49 11.96,29.58 11.26,28.89 11.23,28.85 | U3.1 14.75,26.6 14.5,26.6 13.8,27.3 U3.9 | 38.66,22.57 38.63,22.54 38.63,22.41 C10.2 | 38.66,22.57 38.63,22.6 38.5,22.73 37.3,22.73 C11.2 37.23,22.79 37.23,22.92 36.6,23.55 35.14,23.55 34.88,23.3 34.88,22.73 | 38.66,22.57 38.71,22.52 39.5,23.31 X1.2 39.52,23.42 40.72,24.63 X1.4 40.66,24.76 40.91,24.5 43.58,24.5 | 43.58,24.5 43.58,24.95 C1.2 | 43.58,24.5 43.58,23.93 C2.2 | C12.2 35.58,26.66 35.2,26.66 34.82,27.04 C13.1 34.76,27.04 34.18,26.47 v34.18,25.9
  Top 0.127: C15.1 32.15,26.73 32.22,26.66 33.04,26.66 C16.1 33.04,26.6 v33.04,24.88 | v28.47,23.42 27.71,24.19 27.71,25.2 C5.1 | 34.88,22.73 34.5,22.73 34.31,22.92 U1.P$74 | 34.88,22.73 35.2,22.73 U1.P$F23 | 30.69,22.98 30.94,23.23 30.94,23.87 U1.P$B7 | 30.69,22.98 U1.P$74 | U1.P$74 30.69,20.57 30.69,19.42 U1.P$87 30.75,19.42 31.83,19.42 U1.P$88 | U1.P$83 30.69,20.63 U1.P$74 | U1.P$84 31.9,20.63 31.9,20.95 U1.P$74 | U1.P$74 33.11,20.57 33.11,19.42 U1.P$89 33.17,19.42 34.25,19.42 U1.P$90 | U1.P$74 33.11,20.63 U1.P$85 33.17,20.63 34.25,20.63 U1.P$86 | U1.P$79 30.69,21.84 31.26,22.41 U1.P$74 | U1.P$80 31.9,21.84 U1.P$74 | U1.P$81 33.11,21.84 U1.P$74 | U1.P$82 34.25,21.84 33.74,22.35 U1.P$74 | U1.P$76 31.83,22.92 31.33,22.41 U1.P$74 | U1.P$78 34.31,22.98 U1.P$74 | 30.69,22.98 U1.P$75 | 30.69,22.98 U1.P$74 | U1.P$77 33.11,22.92 33.68,22.35 U1.P$74 | 34.88,22.73 U1.P$74 | 20.31,27.2 20.09,27.43 20.09,28.38 J4.A12_B1 20.02,28.44 19.45,28.44 18.94,28.95 J4.SH4 | 20.31,27.2 20.72,26.79 21.48,26.79 R2_USB.2 | D3.2 19.83,24.57 19.58,24.57 19.07,25.08 19.07,25.96 20.28,27.17 20.31,27.2 | R9.1 17.1,30.6 17.23,30.73 17.29,30.73 17.74,31.17 17.74,31.3 C37.1 17.8,31.3 17.93,31.3 18.88,32.25 18.88,33.14 J4.SH2 27.52,33.14 J4.SH1 | v16.34,31.11 16.21,31.24 15.26,31.24 IC1.D2 | v22.69,21.2 22.56,21.33 22.25,21.33 R3.1 | IC9.C1 37.61,30.35 37.3,30.35 IC9.B1 37.23,30.28 37.23,30.16 37.04,29.97 34.31,29.97 32.47,31.81 32.47,33.01 | IC9.C1 37.61,30.41 37.61,30.73 IC9.C2 37.68,30.79 37.68,31.11 IC9.C3 | C33.2 40.41,26.98 39.58,26.98 C25.2 39.52,26.98 39.39,26.98 37.68,28.69 37.68,30.28 IC9.C1 | C14.1 28.98,28.19 28.34,28.19 27.58,28.95 J4.SH3
  Top 0.127: R1_USB.1 24.6,26.85 25.29,26.85 26.44,28 26.44,28.38 J4.A1_B12 26.5,28.44 27.01,28.95 27.52,28.95 J4.SH3 | C23.1 34.12,33.27 33.17,33.27 32.91,33.01 C24.1 32.85,33.01 32.47,33.01 | 32.47,33.01 31.71,33.01 30.88,33.84 28.22,33.84 27.58,33.2 J4.SH1 | J4.SH3 27.58,29.01 J4.SH1
  Bottom 0.127: 26.98,12.98 v26.56,13.39 26.56,13.33 24.15,13.33 | 26.98,12.98 v28.98,10.98 28.98,10.28 26.88,8.18 v26.88,6.03 v26.88,5.07 | 15.86,9.49 19.71,13.33 24.15,13.33 | 15.86,9.49 15.83,9.45 v15.83,7.04 v15.83,5.01 | v23.64,18.73 23.64,18.34 24.15,17.84 24.15,17.71 | 24.15,13.33 24.15,17.71 | v28.15,14.15 27.01,13.01 26.98,12.98 | 24.15,17.71 v24.34,17.71 | U1.P$77 33.04,22.98 v33.04,24.88 34.06,25.9 v34.18,25.9 | U1.P$75 30.63,22.98 30.18,23.42 v28.47,23.42 28.47,28.06 27.58,28.95 J4.SH3 | v16.34,31.11 16.85,31.11 16.88,31.14 | 16.88,31.14 18.88,33.14 J4.SH2 | v22.69,21.2 22.5,21.2 18.94,24.76 18.94,26.54 | 18.94,26.54 18.94,28.95 J4.SH4 18.88,29.01 16.91,30.98 16.91,31.11 16.88,31.14 | 18.94,26.54 v17.67,26.54 | v14.24,11.11 15.83,9.52 15.86,9.49
  pour Top: -2.9,37.6 48,37.6 48,-2.9 -2.7,-2.9 -2.7,37 -3.3,37 -3.3,37.6 -2.8,37.6
IMU_INT1  (via drill 0.3)
  Top 0.127: v24.34,22.41 25.8,20.95 29.17,20.95 U1.P$N1 | v21.74,22.6 21.29,22.6 20.41,21.71 v20.41,20.63 | v23.71,17.65 23.33,18.03 23.33,18.16 IC3.5
  Bottom 0.127: v24.34,22.41 21.93,22.41 v21.74,22.6 | v20.41,20.63 20.41,19.55 22.75,17.2 23.26,17.2 v23.71,17.65
IMU_INT2  (1 unrouted)
LX1
  Top 0.127: L7.1 42.44,28 42.44,27.62 42.25,27.43 42.2,27.4
  Top 0.152: IC9.B2 IC9.B3 37.27,33.38 42.58,33.38 43.3,32.66 43.71,32.66 44.09,32.27 44.76,31.32 45.25,30.27 45.55,29.15 45.6,28.54 45.6,26.8 45.6,26.7 42.2,26.7 42.2,27.4
LX2
  Top 0.152: IC9.D2 IC9.D3 38.1,31.14 38.1,33 42.4,33 42.5,33 42.5,30.7 42.5,30.4 44.6,30.4 44.6,28.01 L7.2
N$1
  Top 0.127: IC1.D1 14.88,31.24 14.88,31.11 15.33,30.66 16.53,30.66 16.91,31.04 17.04,31.04 R9.2
N$2
  Top 0.127: C23.2 34.4,32.94 34.4,32.1
  Top 0.302: 34.4,32.1 34.4,31.9 32.91,31.9 C24.2 | 34.4,32.1 34.5,32.1 35.1,32.1 36.2,32.1 36.2,32 36.2,31.14 | 34.45,32.1 34.4,32.1 | IC9.A1 36.2,30.34 36.2,30.4 36.2,30.74 | 36.2,30.74 IC9.A2 | IC9.A3 36.2,31.14 | 36.2,31.14 36.2,30.74
N$3
  Top 0.152: IC9.E2 38.47,30.8 39,30.8 39,31.14 | 39,31.14 IC9.E3 | 39,31.14 39,32.4 39.5,32.4 41.7,32.4 41.7,30 40.9,30 40.9,29.7 40.9,28 | 40.9,28 40.9,27.46 C33.1 | 40.9,28 39.6,28 39.56,28 C25.1
N$4
  Top 0.152: R18.1 3.4,31.14 6.39,31.14 6.39,30.81 R17.1
N$5
  Top 0.152: IC9.D1 38.1,30.34 38.1,29.8 40.62,29.8 40.62,30.28 41.37,30.28 41.37,32.11 40.49,32.11 R4.2
N$6
  Top 0.152: IC9.E1 40.34,30.34 40.34,30.56 40.45,30.56 R2.2
N$8
  Top 0.152: IC2.A2 9.61,29.44 9.61,29.77 7.35,29.77 C32.2
N$10
  Top 0.152: TP_SCL.TP 5.19,30.26 R17.2
N$11
  Top 0.152: R18.2 3.07,31.69 3.07,32.07 4.43,32.07 TP_SDA.TP
N$12
  Top 0.127: IC3.1 22.75,19.74 22.75,20.19 21.61,21.33 R3.2
N$13
  Top 0.127: U1.P$AC5 30.44,18.41 29.87,18.41 29.8,18.34 26.82,18.34 C20.1
N$14
  Top 0.152: U1.P$N24 36.68,20.93 36.68,18.2 C9.1
N$15
  Top 0.127: L1.1 37.22,20.28 C3.1
  Top 0.152: L1.1 37.22,21.68 35.2,21.68 35.2,22.18 U1.P$H23
N$16
  Top 0.152: U1.P$C1 28.45,24.2 28.09,24.2 28.09,25.55 27.67,25.55 C5.2
N$17
  Top 0.152: U1.P$B24 35.72,23.9 37,23.9 37.6,23.3 37.9,23.3 37.9,23.6 37.9,23.68 37.91,23.68 37.91,24.81 | 37.91,24.81 X1.1 39.5,25.49 41.28,25.49 41.28,24.97 C1.1 43.11,25.8 43.1,25.8 38.1,25.8 37.91,25.8 37.91,24.81
N$18
  Top 0.127: U1.P$A23 35.2,24.44 35.22,24.46
  Top 0.152: C2.1 43.05,23.4 42.3,23.4 40.66,23.4 X1.3 40.66,23.3 45.2,23.3 45.2,26.14 37.64,26.14 37.64,24.46 35.22,24.46
N$19
  Top 0.152: U1.P$B3 29.67,24.23 29.67,26.16 L2.1
N$20
  Top 0.127: L2.2 29.74,27.23 30.69,27.23 30.88,27.43 L3.1
N$21
  Top 0.127: C13.2 34.82,27.55 34.82,27.43 34.8,27.4
  Top 0.152: 34.8,27.4 34,27.4 33.72,27.4 U1.P$A18
N$22
  Top 0.152: J1.4 11.24,22.13 11.8,22.13 11.8,22.26 EPD_C2.2
N$23
  Top 0.152: J1.5 11.24,21.5 EPD_C1.2
N$26
  Top 0.152: J1.18 11.24,15.13 11.8,15.13 11.8,15.56 EPD_C6.2
N$27
  Top 0.152: J1.19 11.24,14.63 11.8,14.63 11.8,14.8 EPD_C7.2
N$28
  Top 0.152: J1.20 11.24,14.06 EPD_C8.2
N$29
  Top 0.152: J1.21 13.06,13.48 EPD_C9.2
N$30
  Top 0.152: J1.22 12.72,12.98 12.72,12.94 13.02,12.94 EPD_C10.2
N$31
  Top 0.152: J1.23 12.67,12.48 12.67,12.18 13,12.18 EPD_C11.2
N$32
  Top 0.152: J1.24 12.39,11.98 12.39,11.44 12.97,11.44 EPD_C12.2
N$33
  Top 0.152: 21.33,10.8 C2-EP-DR.2 | 21.33,10.8 21.5,10.8 23.11,10.8 D2.1 | 21.33,10.8 21.33,14.32 D4.2
N$34
  Top 0.127: R1_EP_DR.1 29.48,10.22 29.48,9.45 28.66,8.63 SJ1.2 29.04,8.95 30.06,7.93 R_TYPE_SEL.2
N$35
  Top 0.127: L5.1 15.64,11.36 15.64,9.71 16.53,8.82 16.6,8.8
  Top 0.152: Q3.3 30.26,13.5 27.7,13.5 27.7,16.4 22,16.4 20.91,16.4 20.91,8.15 | 20.91,8.15 21.33,8.15 C2-EP-DR.1 | 20.91,8.15 20.91,7.4 21,7.4 23.13,7.4 D5.2 | 20.91,8.15 20.91,7.64 16.6,7.64 16.6,8.8
N$40
  Top 0.152: J4.B5 21.53,28.42 R2_USB.1
N$44
  Top 0.152: J4.A5 24.54,28.42 R1_USB.2
OUT+
  Top 0.127: IC2.A3 10.24,29.46 9.93,29.78 9.93,29.84 9.67,30.09 7.07,30.09 5.67,28.69 3.45,28.69 2.43,29.71 TP1.TP
OUT-  (via drill 0.3)
  Top 0.127: v10.24,27.93 10.24,28.38 IC2.C3 | v4.15,27.93 3.07,26.85 TP2.TP
  Bottom 0.127: v4.15,27.93 v10.24,27.93
P0.00/XL1
  Top 0.127: 26.8,25.4 26.75,25.46 26.12,25.46 X2.1
  Top 0.152: X2.1 24.47,25.49 C17.2 | U1.P$D2 29.52,22.98 27.2,22.98 27.2,25.4 26.8,25.4
P0.01/XL2  (1 unrouted)
  Top 0.152: X2.2 26.09,22.91 24.81,22.91 C18.2
P0.13/1.5D
  Top 0.152: C30.2 14.43,5.16 R5.1 10.55,5.16 SW1.2
P0.14/1.5D
  Top 0.152: C31.2 24.91,4.29 24.91,4.93 24.45,4.93 R8.1 23.85,5 23.85,5.08 21.55,5.08 SW2.2
P1.01/1.6C
  Top 0.127: R_TYPE_SEL1.1 30.37,9.33 30.37,9.65 30.69,9.96 30.75,10
  Top 0.152: 30.75,10 Q1.1
P1.02/1.6C
  Top 0.152: C29.2 36.37,5 R7.1 34.85,5 34.85,5.1 33.05,5.1 33.05,4.2 SW3.2
PMIC_INT  (1 unrouted)
RESE  (via drill 0.3)
  Top 0.127: v16.28,6.6 15.2,6.6 10.18,11.61 10.18,21.71 10.94,22.47 11.2,22.47 J1.3 | v28.53,10.47 29.1,10.47 29.48,10.85 R1_EP_DR.2
  Top 0.152: Q3.2 33.4,14.17 33.4,14.1 33.4,11.8 33.14,11.54 30.41,11.54 30.41,11.23 29.51,11.23 R1_EP_DR.2 | J1.3 11.24,22.63
  Bottom 0.127: v16.28,6.6 16.28,9.52 19.01,12.25 26.75,12.25 v28.53,10.47
RESET  (via drill 0.3)  (1 unrouted)
  Top 0.127: v39.83,11.11 40.53,11.8 J2.6 | v19.2,11.8 19.2,12.12 17.93,13.39 17.93,14.34 14.5,17.77 14.31,17.77 TP_RESET.TP
  Bottom 0.127: v39.83,11.11 37.87,11.11 36.91,10.15 36.15,10.15 35.26,9.27 35.26,8.12 31.77,4.63 26.37,4.63 v19.2,11.8
RF
  Top 0.127: ANT1.1 41.99,21.14 41.8,21.14 41.42,20.76 41.4,20.7
  Top 0.152: L1.2 38.56,20.91 C4.1 | L1.2 39.42,20.91 39.42,20.7 | 39.42,20.7 C22.1 | L1.2 38.22,20.8 | 39.42,20.7 41.4,20.7 41.4,20.6
SCL/1.4C
  Top 0.127: IC2.C1 9.29,28.38 9.29,26.16 9.42,26.03 11.52,26.03 12.53,27.04 12.78,27.04 U3.7
SCL/2.4C  (via drill 0.3)  (1 unrouted)
  Top 0.127: v14.31,32.06 14.82,32.06 IC1.B1 | v23.13,20.76 23.13,19.87 23.26,19.74 IC3.12
  Bottom 0.127: v14.31,32.06 16.4,32.06 18.63,34.28 19.26,34.28 19.77,33.78 19.77,29.71 19.71,29.65 19.71,29.33 19.77,29.27 19.77,26.03 22.94,22.85 24.53,22.85 24.79,22.6 24.79,22.22 23.77,21.2 23.58,21.2 v23.13,20.76
SDA/1.4C  (1 unrouted)
SDA/2.4C  (via drill 0.3)
  Top 0.127: v22.56,30.54 18.5,30.54 18.18,30.22 15.39,30.22 14.5,31.11 14.5,31.36 14.75,31.62 14.82,31.62 IC1.C1 | v28.72,21.9 29.17,21.46 U1.P$L1 | v23.77,20.76 22.82,21.71 21.42,21.71 21.29,21.58 21.29,20.57 22.63,19.23 22.75,19.23 IC3.2
  Bottom 0.127: v22.56,30.54 28.02,25.08 28.02,22.6 28.06,22.57 | v28.72,21.9 28.06,22.57 | v23.77,20.76 26.25,20.76 28.02,22.54 28.06,22.57
SWDCLK
  Top 0.127: TP_SWDCLK.TP 39.26,17.33 37.99,17.33 37.94,17.33
  Top 0.152: U1.P$AA24 36.4,18.93 36.4,17.76 37.94,17.76 | J2.4 39.31,12.23 39.17,12.37 38.34,13.2 38.34,17.76 37.94,17.76 | 37.94,17.76 37.94,17.33
SWDIO  (via drill 0.3)
  Top 0.127: v30.44,31.11 30.44,32.57 TP_SWDIO.TP | v35.96,18.03 36.09,18.03 36.12,18.03
  Top 0.152: U1.P$AC24 36.12,18.43 36.12,18.03 36.12,17.44 36.4,17.44 36.4,15.6 35.6,15.6 35.6,15 35.6,14.68 35.27,14.34 35.27,13.1 36.37,11.99 37.1,11.99 37.28,11.81 J2.2
  Bottom 0.127: v30.44,31.11 35.96,25.58 v35.96,18.03
SWO
  Top 0.127: U1.P$AD22 34.69,17.9 34.69,16.82 34.38,16.5 34.38,8.12 39.58,2.91 39.96,2.91 TP_SWO.TP
VBAT/1.2A  (via drill 0.3)
  Top 0.152: U3.3 15.07,27.3
  Top 0.3: U3.2 14.82,27.11 14.94,27.23 15.07,27.3 15.13,27.3 15.26,27.17 16.4,27.17 C27.2 16.59,27.11 16.91,27.11 v17.04,26.98 | v34.82,8.31 38.88,4.25 43.33,4.25 TP_VBAT.TP
  Bottom 0.3: v17.04,26.98 17.04,26.09 v34.82,8.31
VBAT/2.5C
  Top 0.3: IC1.C2 17.77,31.64 C37.2
VBUS/1.5D  (via drill 0.3)
  Top 0.3: C43.2 16.28,24.44 17.67,24.44 19.13,22.98 20.59,22.98 21.48,23.87 21.48,24 21.99,24.5 22.31,24.5 D3.5 21.86,24.57 v21.42,25.01 | v20.91,27.23 20.91,28.38 J4.A9_B4 | v25.1,27.36 25.61,27.87 25.61,28.38 J4.A4_B9
  Top 0.302: C42.2 15.39,25 15.4,25 16.15,25 C43.2
  Bottom 0.3: v21.42,25.01 20.91,25.52 v20.91,27.23 20.98,27.36 v25.1,27.36
VBUS/2.6D  (via drill 0.3)
  Top 0.3: IC1.A2 15.22,32.64 15.2,32.64 15.2,33.3 | 29.74,16.88 29.74,16.44 C21.1 | 29.74,16.88 29.74,17.9 U1.P$AD2 | v22.94,17.65 23.71,16.88 29.61,16.88 29.74,16.88 | v13.48,29.01 13.48,31.74 13.16,32.06 C38.2
  Top 0.302: 29.82,16.36 C21.1 | 15.2,33.3 13.03,33.3 C38.2
  Bottom 0.3: v22.94,17.65 22.94,19.55 v13.48,29.01
VREG
  Top 0.3: IC1.B2 15.8,32.04 15.8,32.1 15.8,34 11.4,34 11.36,34 11.36,33.46 | 11.36,33.46 C39.1 | TP_VREG.TP 8.02,33.46 11.26,33.46 11.36,33.46